# EAGLE board esp32_lora_gateway (EAGLE 9.1.3)
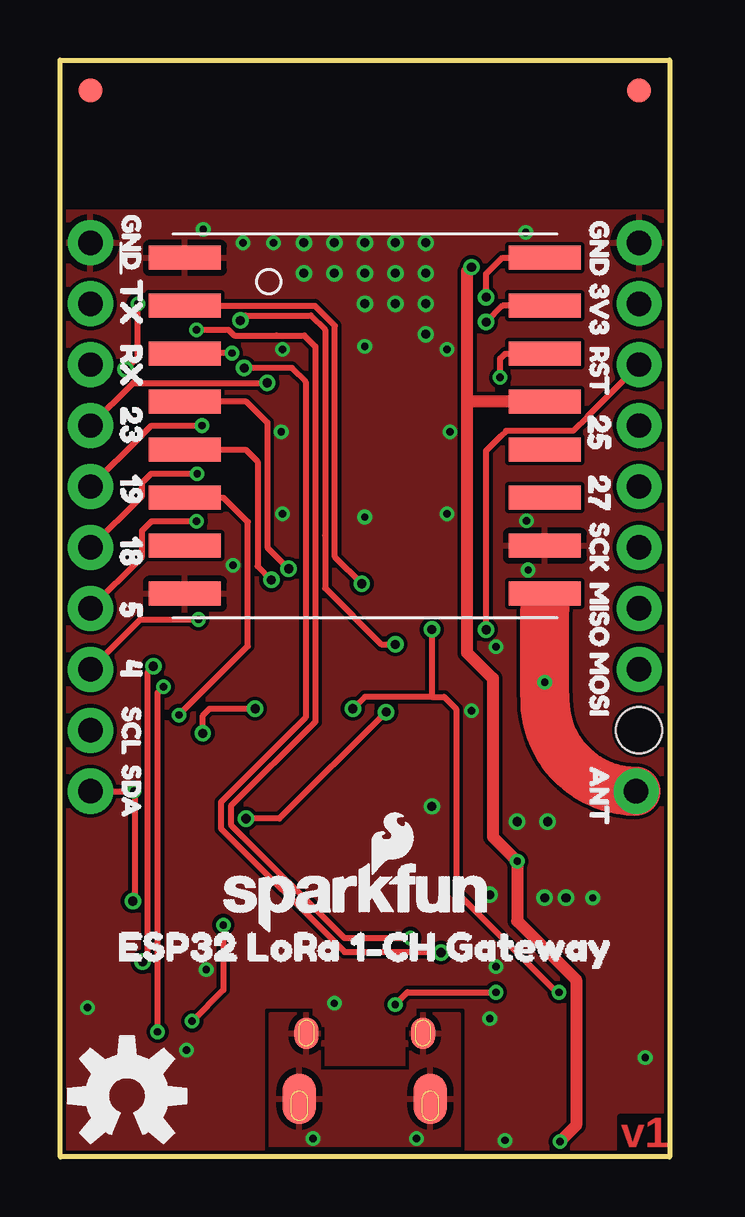
[diagram p0: board, top side]
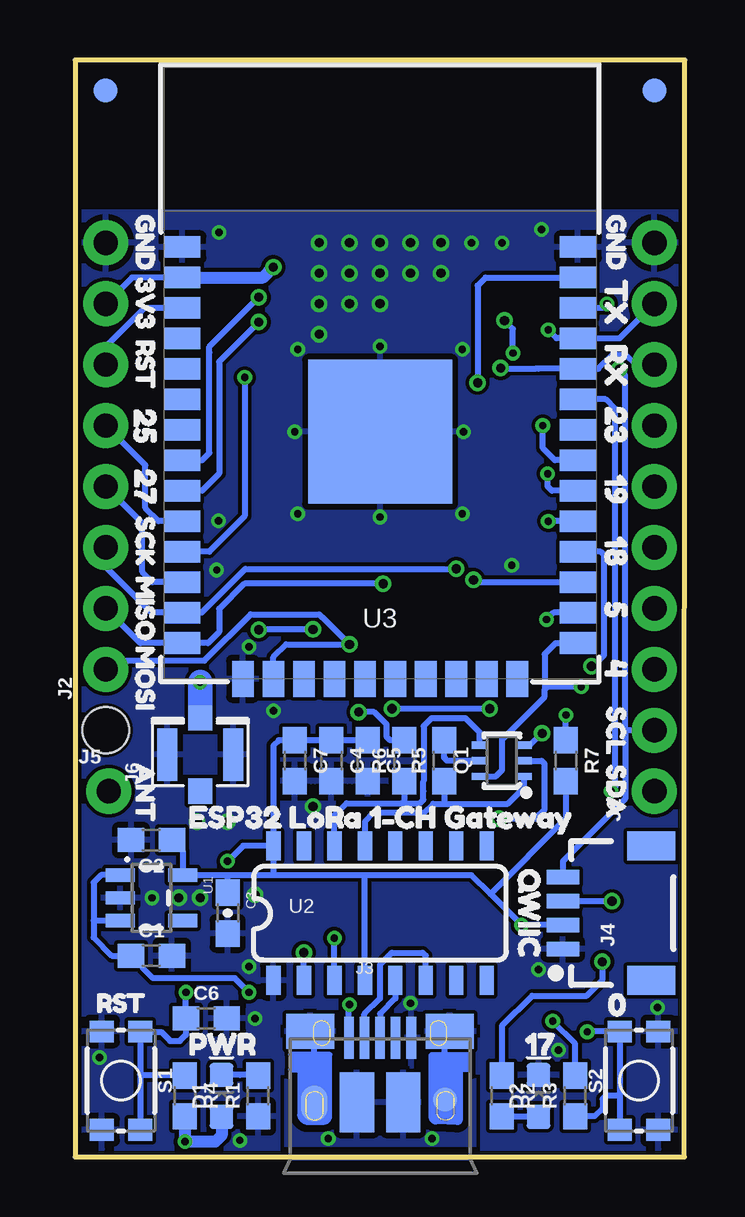
[diagram p1: board, bottom side, seen from below]

Size 25.4 x 45.72 mm. Coordinates in mm from the lower left corner, seen from the top.
Outline: 25.4,0 0.02,0 0,45.72 25.4,45.72 25.4,0
Copper layers (1*16): Top 0.035mm / dielectric 1.5mm / Bottom 0.035mm
Design rules "SparkFun-2-layer-PCBWay-LIMIT": minimum track width 6mil, minimum drill 0.3mm, track to track 6mil, track to pad 6mil, pad to pad 6mil, via to via 6mil, smd to smd 6mil, copper to edge 6mil, drill to drill 6mil, minimum pad ring 6mil, minimum via ring 6mil, stop-mask expansion 4mil, vias tented up to drill 25mil, thermal gap 10mil
Net classes: 0 default: width 0.152 mm, drill 0.305 mm; 1 power: width 0.178 mm
Holes 1.93 mm at 24.13,17.78

## Footprints (pad centres in the part's own frame; a part is rotated, then mirrored left to right if it is on the bottom)
0603 = smd 1.1 x 1: 1 -0.85,0; 2 0.85,0
0603-CAP = smd 1.1 x 1: 1 -0.85,0; 2 0.85,0
LED-0603 = smd 1 x 1: A -0.877,0; C 0.877,0
FIDUCIAL-1X2 = smd 1 x 1: 1 0,0
1X10_NO_SILK = drill 1.016 pad 1.88: 1 0,0; 2 2.54,0; 3 5.08,0; 4 7.62,0; 5 10.16,0; 6 12.7,0; 7 15.24,0; 8 17.78,0; 9 20.32,0; 10 22.86,0
1X08_NO_SILK = drill 1.016 pad 1.88: 1 0,0; 2 2.54,0; 3 5.08,0; 4 7.62,0; 5 10.16,0; 6 12.7,0; 7 15.24,0; 8 17.78,0
USB-MICROB-PTH-MILL = smd 0.4 x 1.75: D+ 0,0; D- -0.65,0; GND 1.3,0; ID 0.65,0; VBUS -1.3,0 | smd 2 x 1.46: SHIELD -2.9,0.275; SHIELD2 2.9,0.275 | smd 1.425 x 2.5: SHIELD3 -0.963,-2.675; SHIELD4 0.963,-2.675 | smd 1.4 x 2.1 bottom: SHIELD5 -2.731,-2.531; SHIELD7 2.729,-2.531 | smd 1 x 1: SHIELD6 2.7,-2.575 | smd 1.1 x 1.5: SHIELD8 -2.731,-2.731 | smd 1 x 1.3 bottom: SHIELD9 -2.43,0.195; SHIELD10 2.43,0.195
1X04_1MM_RA = smd 0.6 x 1.35: 1 -1.5,0; 2 -0.5,0; 3 0.5,0; 4 1.5,0 | smd 1.2 x 2: NC1 2.8,-3.675; NC2 -2.8,-3.675
1X01_NO_SILK = drill 1.016 pad 1.88: 1 0,0
U.FL = smd 2.2 x 0.85: 1 0,1.375; 2 0,-1.375 | smd 1.05 x 1: FEED 1.525,0; NC -1.525,0
SC70-6 = smd 0.3 x 0.66: 1 -0.65,-0.92; 2 0,-0.92; 3 0.65,-0.92; 4 0.65,0.92; 5 0,0.92; 6 -0.65,0.92
TACTILE_SWITCH_SMD_4.6X2.8MM = smd 0.9 x 1: 1 -2.05,-0.8; 2 2.05,-0.8; 3 2.05,0.8; 4 -2.05,0.8
SOT23-5 = smd 0.55 x 1.2: 1 -0.95,-1.3; 2 0,-1.3; 3 0.95,-1.3; 4 0.95,1.3; 5 -0.95,1.3
SO016 = smd 0.6 x 1.2: 1 -4.445,-2.8; 2 -3.175,-2.8; 3 -1.905,-2.8; 4 -0.635,-2.8; 5 0.635,-2.8; 6 1.905,-2.8; 7 3.175,-2.8; 8 4.445,-2.8; 9 4.445,2.8; 10 3.175,2.8; 11 1.905,2.8; 12 0.635,2.8; 13 -0.635,2.8; 14 -1.905,2.8; 15 -3.175,2.8; 16 -4.445,2.8
ESP-WROOM-32-NARROW = smd 0.9 x 1.5: 1 6.43,8.238; 2 5.16,8.238; 3 3.89,8.238; 4 2.62,8.238; 5 1.35,8.238; 6 0.08,8.238; 7 -1.19,8.238; 8 -2.46,8.238; 9 -3.73,8.238; 10 -5,8.238; 11 -6.27,8.238; 12 -7.54,8.238; 13 -8.81,8.238; 14 -10.08,8.238; 25 -10.08,-8.238; 26 -8.81,-8.238; 27 -7.54,-8.238; 28 -6.27,-8.238; 29 -5,-8.238; 30 -3.73,-8.238; 31 -2.46,-8.238; 32 -1.19,-8.238; 33 0.08,-8.238; 34 1.35,-8.238; 35 2.62,-8.238; 36 3.89,-8.238; 37 5.16,-8.238; 38 6.43,-8.238 | smd 1.5 x 0.9: 15 -11.57,5.715; 16 -11.57,4.445; 17 -11.57,3.175; 18 -11.57,1.905; 19 -11.57,0.635; 20 -11.57,-0.635; 21 -11.57,-1.905; 22 -11.57,-3.175; 23 -11.57,-4.445; 24 -11.57,-5.715 | smd 6 x 6: GND -1.27,0
RFM95/96/97/98W = smd 3 x 1: 3.3V 7.5,1; !RESET -7.5,-3; ANT 7.5,-7; DIO0 7.5,3; DIO1 7.5,5; DIO2 7.5,7; DIO3 7.5,-3; DIO4 7.5,-1; DIO5 -7.5,-5; GND@1 -7.5,7; GND@2 -7.5,-7; GND@3 7.5,-5; MISO -7.5,5; MOSI -7.5,3; NSS -7.5,-1; SCK -7.5,1

## Placement (x,y rotation side)
C1  1.0uF  [0603]  22.23,8.38 0 bottom
C2  1.0uF  [0603]  22.23,13.21 180 bottom
C3  0.1uF  [0603-CAP]  19.05,10.16 270 bottom
C4  0.1uF  [0603]  14.73,16.51 270 bottom
C5  10uF  [0603]  13.21,16.51 270 bottom
C6  0.1uF  [0603]  19.94,5.77 0 bottom
C7  4.7uF  [0603]  16.26,16.51 270 bottom
D1  RED  [LED-0603]  19.3,2.54 90 bottom
D2  BLUE  [LED-0603]  6.1,2.54 90 bottom
FD1  FIDUCIAL1X2  [FIDUCIAL-1X2]  1.27,44.45 0 bottom
FD2  FIDUCIAL1X2  [FIDUCIAL-1X2]  1.27,44.45 0 top
FD3  FIDUCIAL1X2  [FIDUCIAL-1X2]  24.13,44.45 0 bottom
FD4  FIDUCIAL1X2  [FIDUCIAL-1X2]  24.13,44.45 0 top
FRAME1  FRAME-LETTER  [CREATIVE_COMMONS]  22.86,-7.62 0 bottom  (outside the outline)
J1  [1X10_NO_SILK]  1.27,15.24 90 bottom
J2  [1X08_NO_SILK]  24.13,20.32 90 bottom
J3  USB  [USB-MICROB-PTH-MILL]  12.7,4.95 0 bottom
J4  QWIIC  [1X04_1MM_RA]  5.08,10.16 90 bottom
J5  [1X01_NO_SILK]  24,15.24 0 bottom
J6  U.FL  [U.FL]  20.19,16.76 90 bottom
LOGO1  OSHW-LOGOM  [OSHW-LOGO-M]  2.79,2.54 0 top
LOGO2  REVISION  [REVISION]  11.43,-11.43 0 bottom  (outside the outline)
LOGO3  SFE_LOGO_NAME.1_INCH  [SFE_LOGO_NAME_.1]  6.35,8.89 0 top
LOGO4  SFE_LOGO_FLAME.1_INCH  [SFE_LOGO_FLAME_.1]  12.7,11.43 0 top
Q1  MBT3904DW1T1  [SC70-6]  7.62,16.51 90 bottom
R1  1k  [0603]  17.78,2.54 90 bottom
R2  1k  [0603]  7.62,2.54 270 bottom
R3  10k  [0603]  4.57,2.54 90 bottom
R4  10k  [0603]  20.83,2.54 270 bottom
R5  10k  [0603]  10.03,16.51 90 bottom
R6  10k  [0603]  11.68,16.51 90 bottom
R7  10k  [0603]  4.95,16.51 270 bottom
S1  RESET  [TACTILE_SWITCH_SMD_4.6X2.8MM]  23.5,3.17 270 bottom
S2  0  [TACTILE_SWITCH_SMD_4.6X2.8MM]  1.91,3.17 90 bottom
U1  3.3V  [SOT23-5]  22.23,10.79 270 bottom
U2  CH340C  [SO016]  12.7,10.16 0 bottom
U3  ESP-WROOM-32NARROW  [ESP-WROOM-32-NARROW]  12.7,31.5 90 bottom
U4  RFM96W  [RFM95/96/97/98W]  12.7,30.48 0 top
U$1  [GND0]  22.48,39.94 270 bottom
U$2  [3V31]  22.48,37.34 270 bottom
U$3  [RST2]  22.48,34.73 270 bottom
U$4  [2517]  22.48,32 270 bottom
U$5  [279]  22.48,29.46 270 bottom
U$6  [SCK3]  22.48,27.37 270 bottom
U$7  [MISO4]  22.48,24.89 270 bottom
U$8  [MOSI5]  22.48,21.97 270 bottom
U$9  [ANT6]  22.48,17.12 270 bottom
U$10  [GND0]  2.86,39.94 270 bottom
U$11  [TX16]  2.86,37.34 270 bottom
U$12  [RX15]  2.86,34.67 270 bottom
U$13  [2314]  2.86,32.07 270 bottom
U$14  [1912]  2.86,29.21 270 bottom
U$15  [1811]  2.86,26.67 270 bottom
U$16  [513]  2.86,23.94 270 bottom
U$17  [410]  2.86,21.53 270 bottom
U$18  [SCL8]  2.86,19.43 270 bottom
U$19  [SDA7]  2.86,17.02 270 bottom
U$20  [RST2]  25.21,6.41 0 bottom
U$21  [020]  4,6.35 0 bottom
U$22  [PWR19]  21.46,4.7 0 bottom
U$23  [1722]  7.43,4.7 0 bottom
U$24  [QWIIC18]  6.48,12.95 270 bottom
U$25  [ESP32_LORA_1#CH_GATEWAY21]  21.46,14.16 0 bottom
U$26  [GND0]  2.98,39.94 270 top
U$27  [TX16]  2.98,37.34 270 top
U$28  [RX15]  2.98,34.67 270 top
U$29  [2314]  2.98,32.07 270 top
U$30  [1912]  2.98,29.21 270 top
U$31  [1811]  2.98,26.67 270 top
U$32  [513]  2.98,23.94 270 top
U$33  [410]  2.98,21.53 270 top
U$34  [SCL8]  2.98,19.43 270 top
U$35  [SDA7]  2.98,17.02 270 top
U$36  [ANT6]  22.48,16.99 270 top
U$37  [GND0]  22.48,39.69 270 top
U$38  [3V31]  22.48,37.08 270 top
U$39  [RST2]  22.48,34.48 270 top
U$40  [2517]  22.48,31.75 270 top
U$41  [279]  22.48,29.21 270 top
U$42  [SCK3]  22.48,27.11 270 top
U$43  [MISO4]  22.48,24.64 270 top
U$44  [MOSI5]  22.48,21.72 270 top
U$45  [ESP32_LORA_1#CH_GATEWAY23]  1.4,8.76 0 top

## Library data of the parts
C1 C2 = SparkFun-Capacitors; PROD_ID: CAP-00868
C3 C4 C6 = SparkFun-Capacitors; PROD_ID: CAP-00810
C5 = SparkFun-Capacitors; PROD_ID: CAP-11015
C7 = SparkFun-Capacitors; PROD_ID: CAP-08280
D1 = SparkFun-LED; PROD_ID: DIO-00819
D2 = SparkFun-LED; PROD_ID: DIO-08575
FD1-FD4 FRAME1 LOGO1-LOGO4 = SparkFun-Aesthetics
J1 = SparkFun-Connectors; PROD_ID: CONN-11563
J2 = SparkFun-Connectors; PROD_ID: CONN-08438
J3 = SparkFun-Connectors; PROD_ID: CONN-13711
J4 = SparkFun-Connectors; PROD_ID: CONN-13694
J5 = SparkFun-Connectors
J6 = SparkFun-Connectors; PROD_ID: CONN-09193; SF_ID: WRL-09144
Q1 = esp32-thing-temp; PROD_ID: TRANS-13337
R1 R2 = SparkFun-Resistors; PROD_ID: RES-07856
R3-R7 = SparkFun-Resistors; PROD_ID: RES-00824
S1 S2 = SparkFun-Switches; PROD_ID: SWCH-13065
U1 = SparkFun-IC-Power; PROD_ID: VREG-12457
U2 = SparkFun-IC-Comms; PROD_ID: IC-14038
U3 = esp32_lora_gateway
U4 = SparkX
U$1-U$45 = buzzard_labels

## Nets
0: Q1.6 R3.1 S2.3 S2.4 U3.25
3.3V: C2.1 C3.1 C4.1 C5.1 C7.1 D1.A J2.7 J4.2 R3.2 R4.2 R7.2 U1.5 U2.4 U2.16 U3.2 U4.3.3V
!DTR: Q1.1 R5.1 U2.13
!RTS: Q1.4 R6.1 U2.14
ANT: J5.1 J6.FEED U4.ANT
D+: J3.D+ U2.5
D-: J3.D- U2.6
GND: C1.2 C2.2 C3.2 C4.2 C5.2 C6.2 C7.2 D2.C J1.10 J2.8 J3.GND J4.1 J6.1 J6.2 R1.1 S1.1 S1.2 S2.1 S2.2 U1.2 U2.1 U3.1 U3.15 U3.38 U3.GND U4.GND@1 U4.GND@2 U4.GND@3
IO4: J1.3 U3.26
IO5: J1.4 U3.29
IO17: R2.1 U3.28
IO18: J1.5 U3.30
IO19: J1.6 U3.31
IO23: J1.7 U3.37
IO25: J2.5 U3.10
IO27: J2.4 U3.12
MISO: J2.2 U3.14 U4.MISO
MOSI: J2.1 U3.16 U4.MOSI
N$1: D1.C R1.2
N$2: D2.A R2.2
N$10: Q1.5 R5.2
N$12: Q1.2 R6.2
RESET: C6.1 J2.6 Q1.3 R4.1 S1.3 S1.4 U3.3
RFM_CS: U3.27 U4.NSS
RFM_DIO1/33: U3.9 U4.DIO1
RFM_DIO2/32: U3.8 U4.DIO2
RFM_INT/26: U3.11 U4.DIO0
RFM_RST: R7.1 U4.!RESET
RXI: J1.8 U2.2 U3.34
SCK: J2.3 U3.13 U4.SCK
SCL: J1.2 J4.4 U3.36
SDA: J1.1 J4.3 U3.33
SHIELD: J3.SHIELD J3.SHIELD2 J3.SHIELD3 J3.SHIELD4 J3.SHIELD5 J3.SHIELD6 J3.SHIELD7 J3.SHIELD8 J3.SHIELD9 J3.SHIELD10
TXO: J1.9 U2.3 U3.35
V_USB: C1.1 J3.VBUS U1.1 U1.3

## Tracks (layer width: path | path; a pad name or v marks a point on that pad's centre or on a via)
0  (via drill 0.3)
  Top 0.254: v4.32,19.59 4.06,19.34 v4.06,5.21
  Bottom 0.254: 2.71,2.54 S2.3 4.05,5.22 v4.06,5.21 | 2.71,2.54 S2.4 | R3.1 3.77,1.69 3.43,2.03 3.43,2.41 3.3,2.54 2.71,2.54 | U3.25 5.38,21.42 5.84,20.95 5.84,19.47 | v4.32,19.59 5.73,19.59 5.84,19.47 | Q1.6 7.87,15.86 7.61,16.12 7.61,17.41 5.84,19.18 5.84,19.47
3.3V  (via drill 0.3, 0.38)
  Top 0.254: v17.13,37.07 v17.14,37.08 | v5.5,5.66 6.8,6.96 v6.8,9.66
  Top 0.508: v17.14,37.08 v17.13,37.07 16.97,36.91 16.97,31.37 | 16.97,31.37 16.97,21.01 18.03,19.94 18.03,13.34 v19.05,12.32 19.05,9.83 21.5,7.38 21.5,1.31 v20.83,0.64 | U4.3.3V 17.08,31.48 16.97,31.37
  Bottom 0.254: C2.1 20.93,12.76 U1.5 19.05,11.74 | 19.05,11.74 17.14,11.74 | 17.14,11.74 13.34,11.74 | 13.34,11.74 8.89,11.74 8.1,10.95 | U2.16 17.14,11.74 | C3.1 19.05,11.74 | U2.4 13.34,11.74 | C5.1 C4.1 15.49,17.36 C7.1 16.93,17.36 17.14,17.14 U2.16 | 8.1,10.95 v6.8,9.66 J4.2 | U3.2 23.03,36.66 J2.7 | U2.16 18.41,12.96 v19.05,12.32 | R3.2 4.57,4.72 v5.5,5.66 | R7.2 4.95,14.1 8.1,10.95
  Bottom 0.508: U3.2 17.57,36.66 v17.14,37.08 | D1.A 19.3,0.89 19.56,0.64 v20.83,0.64 R4.2
!DTR
  Bottom 0.254: Q1.1 6.7,15.4 7.38,14.72 10.03,14.72 | 10.03,14.72 10.49,14.72 10.88,14.33 11.05,14.33 12.98,14.33 13.34,13.97 U2.13 | R5.1 10.03,14.72
!RTS
  Bottom 0.254: Q1.4 8.54,17.68 9.13,18.27 10.56,18.27 10.89,17.95 10.89,15.66 10.9,15.65 10.9,15.24 10.9,14.88 11.05,14.73 11.68,14.73 | U2.14 14.61,14.22 14.1,14.73 11.81,14.73 11.68,14.73 | R6.1 11.68,14.73
ANT  (via drill 0.3)
  Top 1.016: 20.2,22.86 U4.ANT | v20.2,19.79 20.2,19.17 20.2,19.04
  Top 2.032: 20.2,19.04 arc90 J5.1 | 20.2,19.17 20.2,22.86
  Bottom 1.016: v20.2,19.79 v20.19,19.78 J6.FEED
D+
  Bottom 0.254: J3.D+ 12.7,5.97 12.06,6.6 U2.5
D-
  Bottom 0.254: U2.6 10.79,8.38 10.92,8.51 12.21,8.51 12.7,8.02 12.7,6.6 13.35,5.95 J3.D-
GND  (via drill 0.3, 0.38)
  other vias: 12.7,33.78 12.7,26.67 16.26,30.23 7.62,38.1 16.13,26.8 16.13,33.66 8.89,38.1 9.27,33.66 24.38,4.14 5.27,4.45 1.14,6.22 5.97,38.66 19.41,38.53 22.2,10.79 18.16,7.92 19.51,24.46 19.43,26.52 7.21,24.66 9.22,30.23 9.27,26.8 18.54,0.69 17.91,5.77 11.43,6.4 6.1,7.8 18.16,21.26 17.14,18.59 15.49,14.61 17.91,10.92 21.08,10.79 20.19,10.79 10.16,38.1 11.43,38.1 12.7,38.1 13.97,38.1 15.24,38.1 10.16,36.83 11.43,36.83 12.7,36.83 13.97,36.83 15.24,36.83 12.7,35.56 13.97,35.56 15.24,35.56 15.24,34.29 19.05,13.97 20.32,13.97
  pour Bottom (isolate 0.152, rank 6): 25.4,0 25.4,39.37 0,39.37 0,0
  pour Top (isolate 0.152, rank 6): 0,0 0,39.37 25.4,39.37 25.4,0
IO4  (via drill 0.3)
  Top 0.254: J1.3 3.35,22.4 v5.77,22.4
  Bottom 0.254: U3.26 5.48,22.69 v5.77,22.4
IO5  (via drill 0.3)
  Top 0.254: J1.4 3.42,25.01 3.42,26.1 3.82,26.49 v5.69,26.49
  Bottom 0.254: U3.29 v5.69,26.5 v5.69,26.49
IO17  (via drill 0.38)
  Top 0.254: v3.44,8.13 3.66,8.34 3.66,20.21 | 3.66,20.21 v3.89,20.45 | 3.66,20.21
  Bottom 0.254: R2.1 7.62,5.46 6.36,6.72 4.08,6.72 3.68,7.11 3.44,7.35 v3.44,8.13 | U3.28 3.51,25.23 3.38,25.09 3.38,20.91 3.84,20.45 v3.89,20.45
IO18  (via drill 0.3)
  Top 0.254: J1.5 3.42,27.55 3.42,28.1 3.8,28.47 v5.71,28.47
  Bottom 0.254: U3.30 5.54,27.77 5.71,27.94 v5.71,28.47
IO19  (via drill 0.3)
  Top 0.254: J1.6 3.42,30.09 3.42,30.1 3.81,30.48 v5.92,30.48
  Bottom 0.254: U3.31 5.41,29.04 5.92,29.54 v5.92,30.48
IO23  (via drill 0.38)
  Top 0.254: J1.7 3.05,32.26 v8.64,32.26
  Bottom 0.254: U3.37 8.3,36.66 8.64,36.32 v8.64,32.26
IO25
  Bottom 0.254: U3.10 21.92,26.5 22.48,27.05 22.48,28.83 J2.5
IO27
  Bottom 0.254: U3.12 22.18,23.96 22.61,24.38 22.61,26.42 J2.4
MISO  (via drill 0.38)
  Top 0.254: U4.MISO 10.62,35.48 11.46,34.65 11.46,25.01 v12.57,23.89
  Bottom 0.254: v12.57,23.89 18.36,23.89 19.41,22.84 19.41,21.87 19.86,21.42 U3.14 22.69,21.42 J2.2
MOSI  (via drill 0.3, 0.38)
  Top 0.254: v7.16,33.5 5.36,33.5 5.22,33.5 U4.MOSI | v13.97,21.36 13.39,21.36 11.05,23.71 11.05,25.91 11.05,34.48 10.45,35.07 7.73,35.07 v7.51,34.86
  Bottom 0.254: v7.16,33.5 7.16,34.51 v7.51,34.86 | U3.16 17.14,20.83 16.61,21.36 v13.97,21.36 15.1,22.49 15.12,22.49 15.24,22.61 18.1,22.61 20.02,20.69 23.76,20.69 J2.1
N$1
  Bottom 0.254: 17.81,3.42 18.54,3.42 | 18.54,3.42 D1.C | R1.2 17.81,3.42 | 17.81,3.42 18.54,3.42
N$2
  Bottom 0.254: D2.A 7.59,1.66 R2.2
N$10
  Bottom 0.254: Q1.5 9.91,16.51 10.03,16.64 R5.2
N$12  (via drill 0.38)
  Top 0.254: v7.75,14.1 9.14,14.1 v13.59,18.54
  Bottom 0.254: v13.59,18.54 12.95,18.54 12.43,18.03 12.43,17.51 12.28,17.36 R6.2 | v7.75,14.1 6.22,14.1 5.84,14.48 5.84,16.38 5.97,16.51 Q1.2
RESET  (via drill 0.3, 0.38)
  Top 0.254: v20.79,6.86 20.7,6.86 16.51,11.05 16.51,18.67 16,19.18 15.49,19.18 | 15.49,19.18 12.7,19.18 v12.2,18.68 | J2.6 21.98,30.87 21.98,30.86 21.38,30.26 18.58,30.26 18.36,30.04 17.75,29.43 v17.75,21.97 | v5.95,17.65 5.95,18.39 6.24,18.68 v8.13,18.68 | v15.49,21.98 15.49,19.18
  Bottom 0.254: U3.3 22.53,35.39 24.13,33.78 J2.6 | Q1.3 6.44,17.16 v5.95,17.65 | v12.2,18.68 v8.13,18.68 | v15.49,21.98 17.74,21.98 v17.75,21.97 | 22.7,3.43 S1.3 | R4.1 22.66,3.39 | 22.66,3.39 22.7,3.43 | v20.79,6.86 C6.1 20.79,5.08 21.04,4.83 21.45,4.83 21.83,5.21 22.7,5.21 S1.4 22.7,3.43 | 22.7,3.43 22.66,3.39
RFM_CS  (via drill 0.38)
  Top 0.254: U4.NSS 7.73,29.48 8.23,28.98 8.23,24.62 v8.8,24.05
  Bottom 0.254: U3.27 7.11,23.96 8.72,23.96 v8.8,24.05
RFM_DIO1/33  (via drill 0.38)
  Top 0.254: U4.DIO1 18.44,35.48 v17.75,34.8
  Bottom 0.254: v17.75,34.8 19.41,33.15 19.41,28.47 20.11,27.77 U3.9
RFM_DIO2/32  (via drill 0.38)
  Top 0.254: U4.DIO2 18.43,37.48 17.75,36.8 v17.75,35.83
  Bottom 0.254: U3.8 20.11,29.04 19.81,29.34 19.81,33.53 19.81,33.77 v17.75,35.83
RFM_INT/26  (via drill 0.3)
  Top 0.254: U4.DIO0 18.54,33.48 18.34,33.28 v18.34,32.49
  Bottom 0.254: U3.11 19.82,25.23 18.34,26.7 v18.34,32.49
RFM_RST  (via drill 0.3)
  Top 0.254: U4.!RESET 6.81,27.48 7.82,26.47 7.82,21.29 v4.95,18.41
  Bottom 0.254: R7.1 v4.95,18.41
RXI  (via drill 0.38)
  Top 0.254: v7.67,32.88 9.66,32.88 10.24,32.31 10.24,18.3 6.72,14.79 6.72,13.72 | 6.72,13.67 6.72,13.72 | v15.88,8.51 15.85,8.53 11.86,8.53 6.72,13.67 | 6.72,13.72 6.72,13.67
  Bottom 0.254: 6.1,32.85 U3.34 3.6,32.85 3,33.45 2.48,33.45 2.05,33.02 J1.8 | 6.1,32.85 6.22,32.85 | 6.1,32.85 6.22,32.85 | v7.67,32.88 7.64,32.85 6.22,32.85 | U2.2 v15.88,8.51
SCK  (via drill 0.38)
  Top 0.254: U4.SCK 7.76,31.48 8.64,30.61 8.64,25.4 v9.53,24.51
  Bottom 0.254: v9.53,24.51 18.31,24.51 20.13,22.69 U3.13 22.23,22.69 24.13,24.58 J2.3
SCL  (via drill 0.3, 0.38)
  Top 0.254: v2.73,32.83 3.24,33.33 v3.24,35.56
  Bottom 0.254: J4.4 5.08,12.32 2.49,14.91 2.49,17.78 | J1.2 2.49,17.78 | v2.73,32.83 2.49,32.58 2.49,30.48 2.49,17.78 | v3.24,35.56 3.42,35.39 U3.36
SDA  (via drill 0.3, 0.38)
  Top 0.254: J1.1 v3.07,15.24 3.11,15.2 3.11,10.74 v3.04,10.66
  Bottom 0.254: J4.3 v3.04,10.66 | U3.33 3.3,31.58 2.9,31.17 2.9,15.42 v3.07,15.24
SHIELD  (via drill 0.3)
  Bottom 0.254: J3.SHIELD6 10,5.03 J3.SHIELD2 | J3.SHIELD8 15.43,5.06 J3.SHIELD
  other vias: 14.86,0.76 10.54,0.76
  pour Bottom (isolate 0.305): 16.64,0 16.64,5.97 14.61,5.97 14.61,3.56 10.79,3.56 10.79,5.97 8.76,5.97 8.76,0.13 8.89,0
  pour Top (isolate 0.305): 8.76,0 8.76,5.97 10.79,5.97 10.79,3.56 14.61,3.56 14.61,5.97 16.64,5.97 16.64,0
TXO  (via drill 0.3)
  Top 0.254: v5.69,34.47 7.02,34.47 7.26,34.23 9.03,34.23 9.03,34.24 10.19,34.24 10.64,33.78 10.64,25.53 10.64,18.14 7.12,14.62 7.12,13.84 11.85,9.12 v14.61,9.12
  Bottom 0.254: U2.3 v14.61,9.12 | v5.69,34.47 5.34,34.12 U3.35 2.71,34.12 J1.9
V_USB  (via drill 0.3)
  Top 0.254: v13.97,6.35 14.48,6.86 v18.16,6.86
  Bottom 0.254: J3.VBUS 14,6.32 v13.97,6.35 | U1.1 24.32,11.74 24.64,11.43 24.64,9.85 | 24.64,9.85 24.64,9.14 23.88,8.38 C1.1 23.07,8.36 22.16,7.44 18.75,7.44 v18.16,6.86 | U1.3 24.64,9.85

## Text on the board
Top: v1
bDocu: Jim Lindblom | Owen Lyke